# EAGLE board GainAmp (EAGLE 9.6.2)

No outline drawn. Coordinates in mm, seen from the top.
Copper layers (1*16): Top 0.035mm / dielectric 1.5mm / Bottom 0.035mm
Design rules "default": minimum track width 6mil, minimum drill 0.35mm, track to track 6mil, track to pad 6mil, pad to pad 6mil, via to via 6mil, smd to smd 6mil, copper to edge 40mil, drill to drill 6mil, minimum pad ring 10mil, minimum via ring 8mil, stop-mask expansion 4mil, vias tented up to drill 0mil, thermal gap 10mil

## Footprints (pad centres in the part's own frame; a part is rotated, then mirrored left to right if it is on the bottom)
C2.5-2 = drill 0.813 pad 1.6 octagon: 1 -1.27,0; 2 1.27,0
0204/5 = drill 0.813 octagon: 1 -2.54,0; 2 2.54,0
DIP794W45P254L959H508Q8 = drill 0.78 pad 1.13 square: 1 -3.97,3.81 | drill 0.78 pad 1.13: 2 -3.97,1.27; 3 -3.97,-1.27; 4 -3.97,-3.81; 5 3.97,-3.81; 6 3.97,-1.27; 7 3.97,1.27; 8 3.97,3.81

## Placement (x,y rotation side)
C1  [C2.5-2]  20.32,31.75 0 top
C2  [C2.5-2]  25.4,31.75 0 top
C5  [C2.5-2]  8.89,17.78 0 top
R7  [0204/5]  27.94,25.4 0 top
R8  [0204/5]  20.32,21.59 0 top
U3  TL081CP  [DIP794W45P254L959H508Q8]  10.16,27.94 0 top

## Library data of the parts
C1 C2 C5 = capacitor-wima
R7 R8 = rcl; SPICEPREFIX: R
U3 = TL081CP; AVAILABILITY: In Stock; CHECK_PRICES: https://www.snapeda.com/parts/TL081CP/Texas+Instruments/view-part/?ref=eda; DESCRIPTION: Single, 30-V, 3-MHz, 13-V/µs slew rate, In to V+, JFET-input op amp; MF: Texas Instruments; MP: TL081CP; PACKAGE: PDIP-8 Texas; PRICE: None; PURCHASE-URL: https://www.snapeda.com/api/url_track_click_mouser/?unipart_id=51607&manufacturer=Texas Instruments&part_name=TL081CP&search_term=tl081; SNAPEDA_LINK: https://www.snapeda.com/parts/TL081CP/Texas+Instruments/view-part/?ref=snap

## Nets
4IN-: C1.2 C2.1 R8.1 U3.2
AOUT: C2.2 R8.2 U3.6
GND: C5.1
N$7: U3.4
N$8: U3.7
N$9: C1.1 R7.2
VDD: C5.2
VOD: R7.1
VREF: U3.3

## Tracks (layer width: path | path; a pad name or v marks a point on that pad's centre or on a via)
4IN-  (3 unrouted)
AOUT  (2 unrouted)
N$9  (1 unrouted)